# Altium PCB mezanine.PcbDoc
Units mm, origin at the board's own origin, x right, y up, seen from the top; angles counter-clockwise.
Board outline 73.5 x 60 mm, 2 copper layers (Top Layer, Bottom Layer), stack 1.611 mm thick; 4 components, 0 nets, 24 pads, 0 vias.
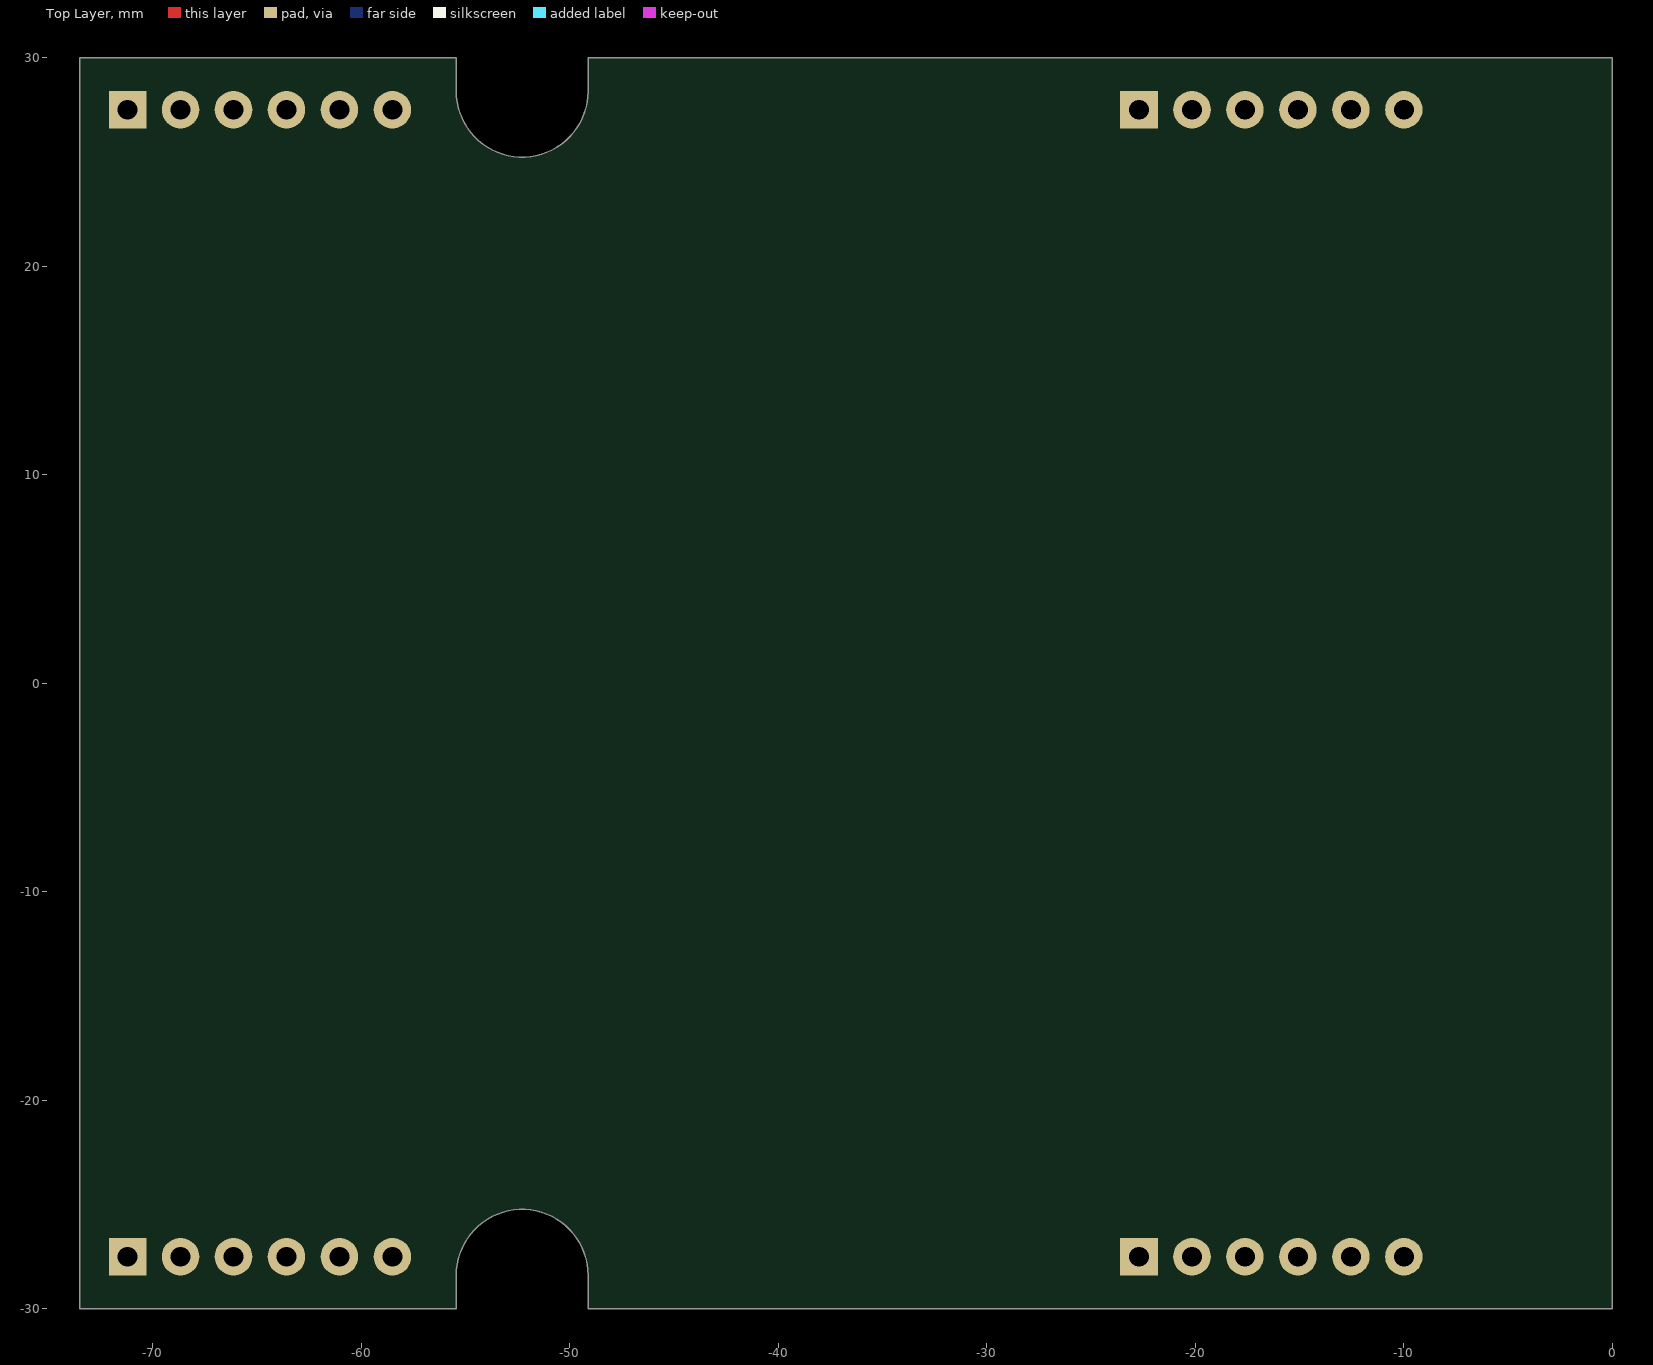
[diagram p0: Top Layer view]
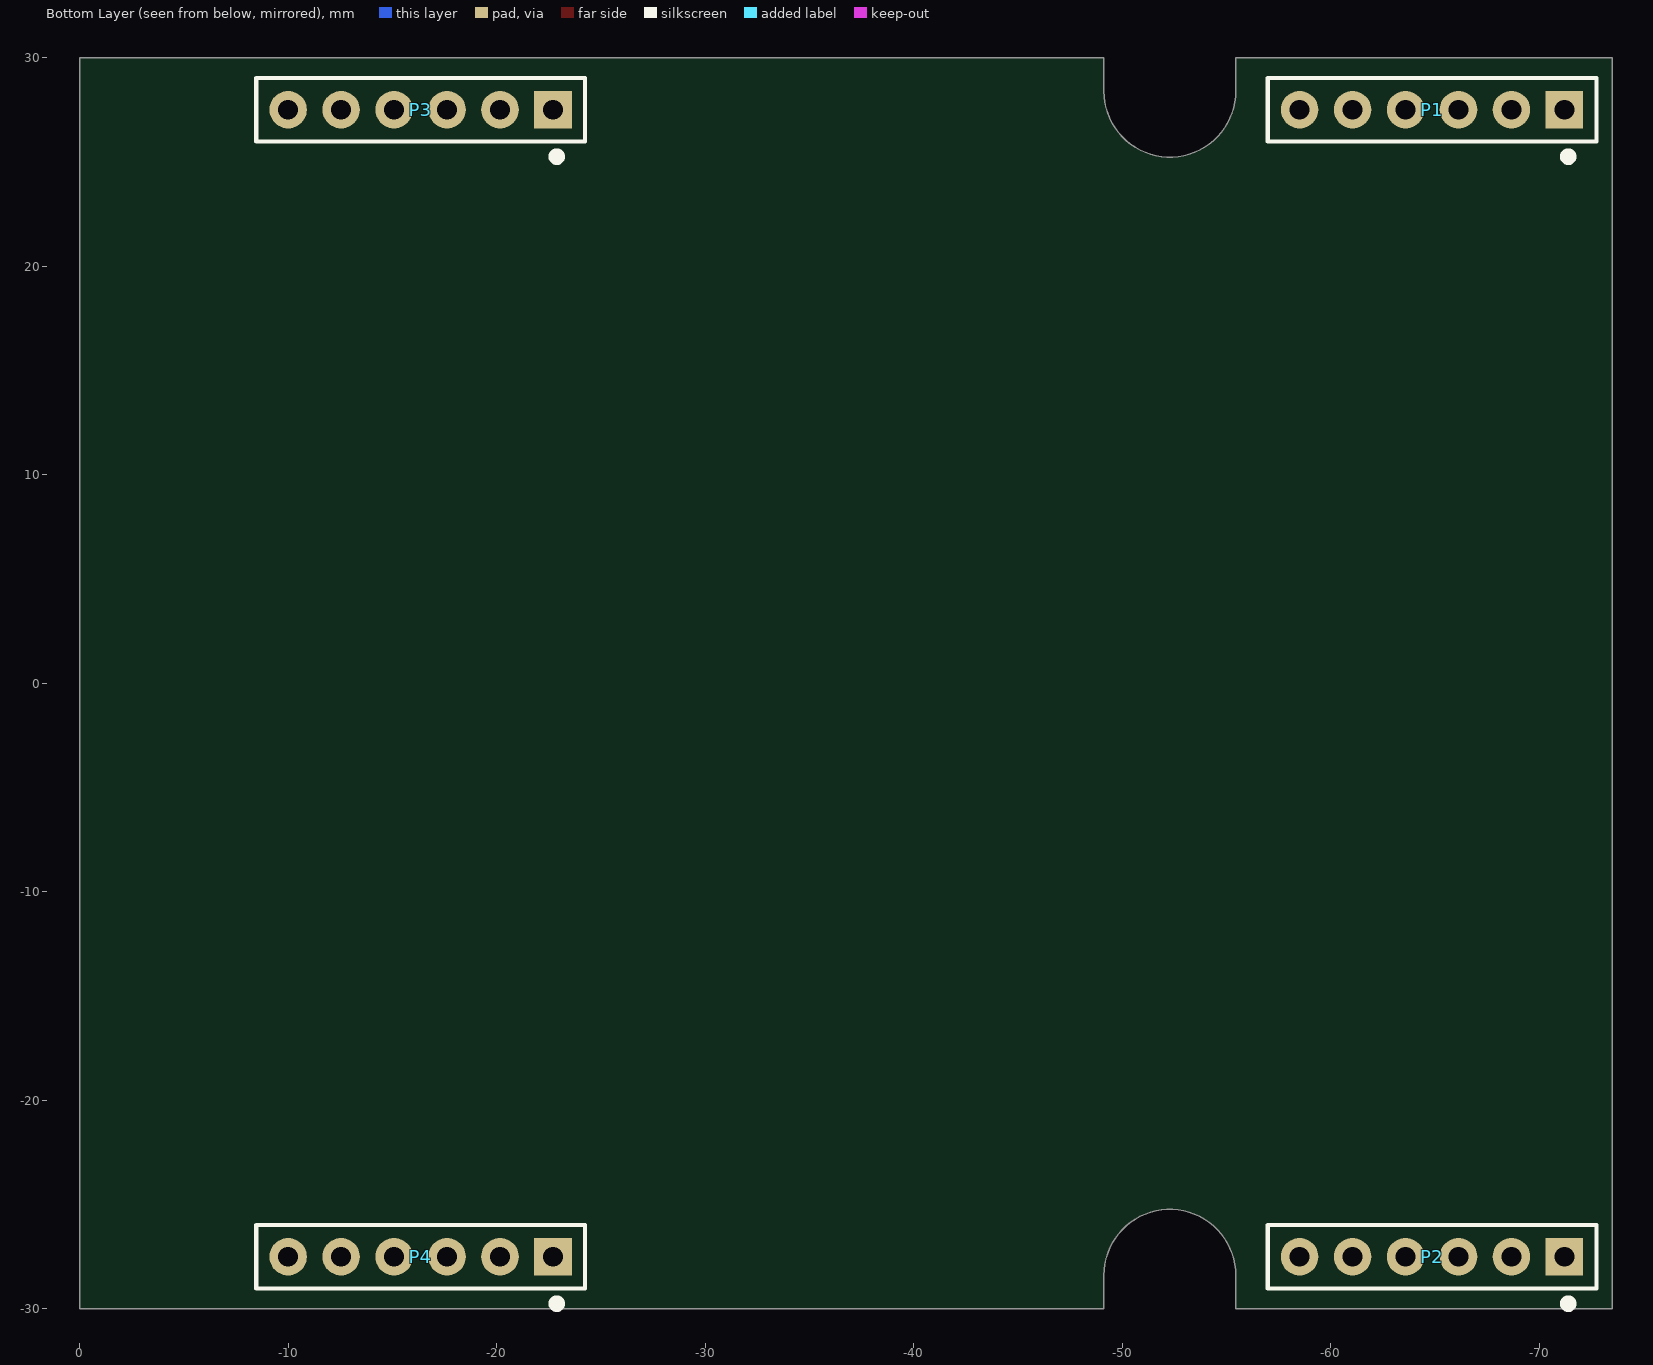
[diagram p1: Bottom Layer view, seen from below]

## Layer stack, top to bottom
Top Layer: signal copper 0.0356
Dielectric: core 1.54, FR-4, Dk 4.8
Bottom Layer: signal copper 0.0356

## Board outline
-73.5,-30 -73.5,30 -55.44,30 -55.44,28.392 ccw(c-52.278,28.392) -49.115,28.392 -49.115,30 0,30 0,-30 -49.115,-30 -49.115,-28.392 ccw(c-52.278,-28.392) -55.44,-28.392 -55.44,-30

## Design rules (kind name [scope] priority, off if disabled: settings)
Clearance Clearance_2 [InNamedPolygon('Top-Layer-GND_EARTH') OR InNamedPolygon('Bottom-Layer-GND_EARTH')] p1: gap=1.6
Clearance Clearance_4 [InNamedPolygon('Top-Layer-GND') OR  InNamedPolygon('Bottom-Layer-GND') OR InNamedPolygon('Bottom-Layer-VCC_3.3')] p2: gap=0.25
Clearance Clearance_1 [InNetClass('HV') vs InNetClass('HV')] p3: gap=1.2
Clearance [All] p4: gap=0.2
ComponentClearance [All] p1: gap=0 collisioncheckmode=3 verticalgap=0 showdistances=FALSE
HoleSize [All] p1: absolutevalues=TRUE maxlimit=8 minlimit=0.025 maxpercent=80.000 minpercent=20.000
HoleToHoleClearance [All] p1: gap=0.2 allowstackedmicrovias=TRUE
MinimumSolderMaskSliver [All] p1: minsoldermaskwidth=0.1
PlaneConnect PlaneConnect_Via [IsVia] p1: planeconnectstyle=Direct reliefexpansion=0.508 reliefentries=4 reliefconductorwidth=0.254 reliefairgap=0.254
PlaneConnect [All] p2: planeconnectstyle=Relief reliefexpansion=0.508 reliefentries=4 reliefconductorwidth=0.254 reliefairgap=0.254
PolygonConnect PolygonConnect_Via [IsVia] p1: connectstyle=Direct reliefconductorwidth=0.254 reliefentries=4 polygonreliefangle="90 Angle" airgapwidth=0.254
PolygonConnect [All] p2: connectstyle=Direct reliefconductorwidth=0.25 reliefentries=4 polygonreliefangle="90 Angle" airgapwidth=0.254
RoomDefinition mezanine-toplevel [InComponentClass('mezanine-toplevel')] p1: confinementstyle=ConfineIn formatcopy=TRUE lockcomponents=FALSE outline -148.5,-43.1 41.8,-43.1 41.8,55.6 -148.5,55.6
RoutingVias [All] p1: holewidth=0.4 width=0.7 viastyle="Through Hole" minholewidth=0.4 minwidth=0.7 maxholewidth=1.6 maxwidth=2
SilkToSilkClearance [All] p1: silktosilkclearance=0
SilkscreenOverComponentPads [IsPad] p1: minsilkscreentomaskgap=0.2
SolderMaskExpansion [All] p1: expansion=0.102
Width [All] p1: maxlimit=4 minlimit=0.15 preferedwidth=0.2
21 further rules are at their usual default settings.

## Components (designator, comment, footprint, x,y, rotation, side; value= is the part's Value field where it differs from the comment)
P1 "0000-00" TSW-106-07-G-S -64.85,27.5 r0 bottom
P2 "0000-00" TSW-106-07-G-S -64.85,-27.5 r0 bottom
P3 "0000-00" TSW-106-07-G-S -16.35,27.5 r0 bottom
P4 "0000-00" TSW-106-07-G-S -16.35,-27.5 r0 bottom

## Footprints (in the part's own frame and the unit in brackets; to place one, negate y for a bottom-side part, rotate by r counter-clockwise, add the part's x,y. Pads: shape width x height; smd on the part's side, far side on the other; paste and mask are expansions set on the pad)
TSW-106-07-G-S [mm] ".025\"  SQ  POST HEADER 2.54mm 6 Positions"
  rect 1.8x1.8 hole 0.95: 1(-6.35,0)
  round 1.8 hole 0.95: 2(-3.81,0) 3(-1.27,0) 4(1.27,0) 5(3.81,0) 6(6.35,0)
  silkscreen extent -7.88,-1.53 7.88,2.45, body extent -7.68,-1.27 7.68,1.27, height 8.38

## Part data
P1 P2 P3 P4: library part "Header 6", "Header, 6-Pin"

## Nets (pads, with @x,y where several pads share a name; then routed paths per layer and width w, separated by ;. In a path a pad name is that pad's centre, name@x,y a point inside that pad or via, vN(x,y) a via of type N, cw(c..) or ccw(c..) an arc to the next point about the centre after c; other vN are vias at no path point)
pads on no net: P1.1 P1.2 P1.3 P1.4 P1.5 P1.6 P2.1 P2.2 P2.3 P2.4 P2.5 P2.6 P3.1 P3.2 P3.3 P3.4 P3.5 P3.6 P4.1 P4.2 P4.3 P4.4 P4.5 P4.6

## Silkscreen, mask and mechanical layers (free items; w line width, h text height)
PCB Boundary:
  the board outline again, w0.1
Mechanical 5:
  circle w0.1: c-27.278,-28.25 r1.6
  circle w0.1: c-77.278,-28.25 r1.6
  circle w0.1: c-77.278,28.25 r1.6
  circle w0.1: c-27.278,28.25 r1.6
  lines w0.1: -48.115,-28.392 ccw(c-52.278,-28.392) -56.44,-28.392 -56.44,-33.663 cw(c-53.972,310.732) -104.027,-30.015 -104.894,-29.874 cw(c-104.278,-26.063) -108.138,-26.063 -108.138,26.063 cw(c-104.278,26.063) -104.894,29.874 -104.027,30.015 cw(c-53.972,-310.732) -56.44,33.663 -56.44,28.392 ccw(c-52.278,28.392) -48.115,28.392 -48.115,33.622 cw(c-53.972,-310.732) -1,29.573 -1,-29.573 cw(c-53.972,310.732) -48.115,-33.622 -48.115,-28.351
Design Information:
  drawing of 210 lines, arcs and shapes, not listed
  text "FABRICATION INFORMATION" at 15.025,-14.5 h1.75
  text "BOARD SIZE:" at 15.025,-17.5 h1.25
  text "109.14mm X 69.72mm" at 56.025,-17.5 h1.25
  text "CONDUCTOR SPACING (MIN):" at 15.025,-20.5 h1.25
  text "0.2mm (8 mils)" at 56.025,-20.5 h1.25
  text "CONDUCTOR WIDTH (MIN):" at 15.025,-23.5 h1.25
  text "0.15mm (6 mils)" at 56.025,-23.5 h1.25
  text "BASE MATERIAL:" at 15.025,-26.5 h1.25
  text "FR4" at 56.025,-26.5 h1.25
  text "BOARD THICKNESS:" at 15.025,-29.5 h1.25
  text "1.6mm" at 56.025,-29.5 h1.25
  text "COOPER LAYERS:" at 15.025,-32.5 h1.25
  text "2" at 56.025,-32.5 h1.25
  text "COPPER THICKNESS (FINISHED):" at 15.025,-35.5 h1.25
  text "35um" at 56.025,-35.5 h1.25
  text "LEGEND MARKING COLOUR:" at 15.025,-38.5 h1.25
  text "WHITE" at 56.025,-38.5 h1.25
  text "SOLDER MASK COLOUR:" at 15.025,-41.5 h1.25
  text "GREEN" at 56.025,-41.5 h1.25
  text "SURFACE FINISH:" at 15.025,-44.5 h1.25
  text "HOT AIR SOLDER LEVEL" at 56.025,-44.5 h1.25
  text "ELECTRICAL TEST:" at 15.025,-47.5 h1.25
  text "REQUIRED" at 56.025,-47.5 h1.25
  text "SURFACE MOUNT:" at 15.025,-50.5 h1.25
  text "TOP" at 56.025,-50.5 h1.25
  text "DWN:" at 14.525,-54 h1
  text "MITTMANN" at 31.025,-54.5 h1.1
  text ".PRINT_DATE" at 29.025,-56.5 h1.1
  text "Bob Mittmann" at 41.025,-56.5 h4
  text "LAYER STACK-UP DETAIL" at -106.647,-57.71 h1.75
  text "CHK:" at 14.525,-59 h1
  text "--" at 31.025,-59.5 h1.1
  text "TITLE:" at 39.525,-60 h1
  text "--" at 29.025,-61.5 h1.1
  text "YARD-ICE" at 41.025,-62.5 h1.5
  text "APVD:" at 14.525,-64 h1
  text "WHITE COLOR SILKSCREEN" at -56.725,-64.5 h1.2
  text "--" at 31.025,-64.5 h1.1
  text "GREEN COLOR SOLDERMASK" at -56.725,-66.5 h1.2
  text "--" at 29.025,-66.5 h1.1
  text "0.035mm+/-0.01mm LAYER #1: TOP (COMPONENT SIDE)" at -56.725,-68.5 h1.2
  text "DWG NO:" at 39.525,-69 h1
  text "REV:" at 75.525,-69 h1
  text "1.6mm+/-10%" at -105.675,-70.5 h1.2
  text "1.53mm+/-0.15mm LAMINATE CORE" at -56.725,-70.5 h1.2
  text "yard-ice" at 41.025,-71.5 h1.5
  text "1.0" at 77.025,-71.5 h1.5
  text "0.035mm+/-0.01mm LAYER #2: BOTTOM" at -56.725,-72.5 h1.2
  text "PART NO:" at 39.525,-74 h1
  text "SCALE:" at 74.525,-74 h1
  text "GREEN COLOR SOLDERMASK" at -56.725,-74.5 h1.2
  text "00000" at 41.025,-76.5 h1.5
  text "1:1" at 77.525,-76.5 h1.5
  text "FILE:" at 14.525,-79.5 h1
  text ".PCB_FILE_NAME_NO_PATH" at 20.025,-79.5 h1.25
  text "RCS REV:" at 66.525,-79.5 h1
  text ".VersionControl_RevNumber" at 75.025,-79.5 h1.25
Assembly Top:
  text ".Layer_Name" at 8.8,-8.675 h0.8 r90
Reference:
  region: -149,7.75 -129.5,7.75 -129.5,-22.75 -149,-22.75
  lines w0.1: -128.4,-26.4 -128.4,33.3 ; -111.1,-33.7 -111.1,26
Drill Drawing:
  text ".Legend" at 14.6,-8 h1.25

## Dimensions
0,-30 to 0,30 on Dimensions
-49.115,30 to -73.5,-30 on Dimensions